# Altium PCB ATmega4809_Curiosity_Nano.PcbDoc (part 1 of 2)
Units mm, origin at the board's own origin, x right, y up, seen from the top; angles counter-clockwise.
Board outline 83.82 x 20.32 mm, 4 copper layers (Top Layer, Gnd Plane, Pwr Plane, Bottom Layer), stack 1.574 mm thick; 77 components, 102 nets, 422 pads, 194 vias.
Unrouted connection lines stored in the file: 1.
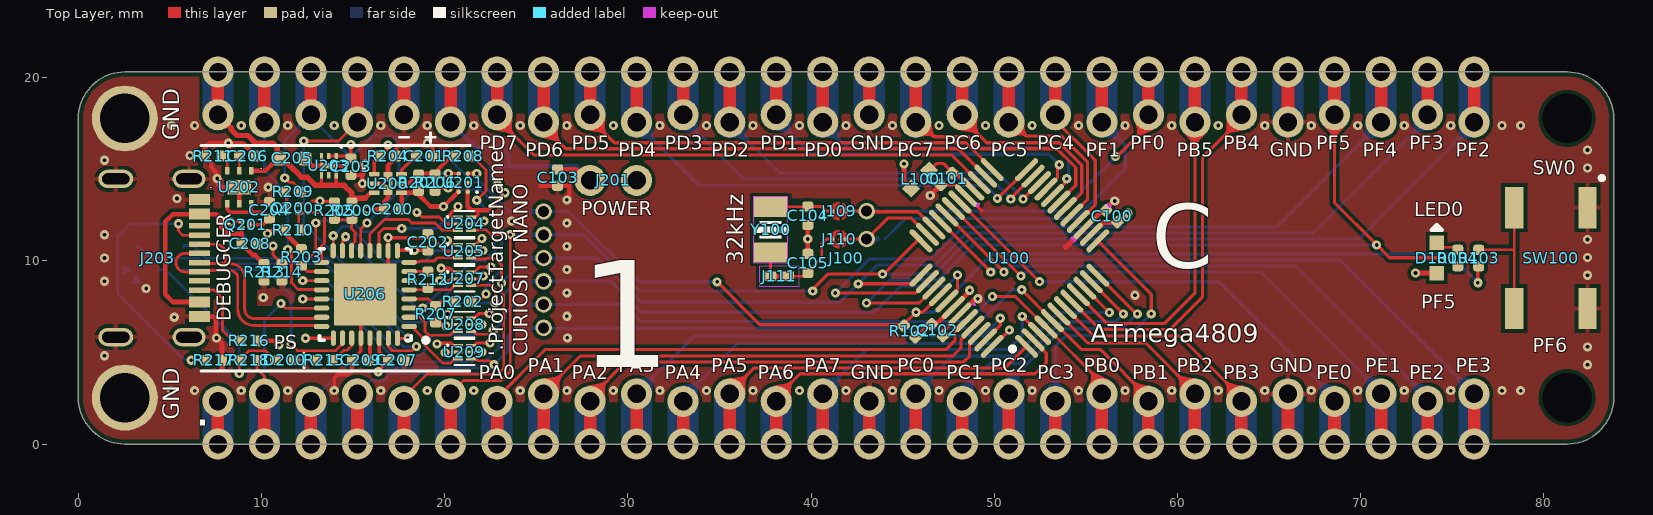
[diagram p0: Top Layer view]
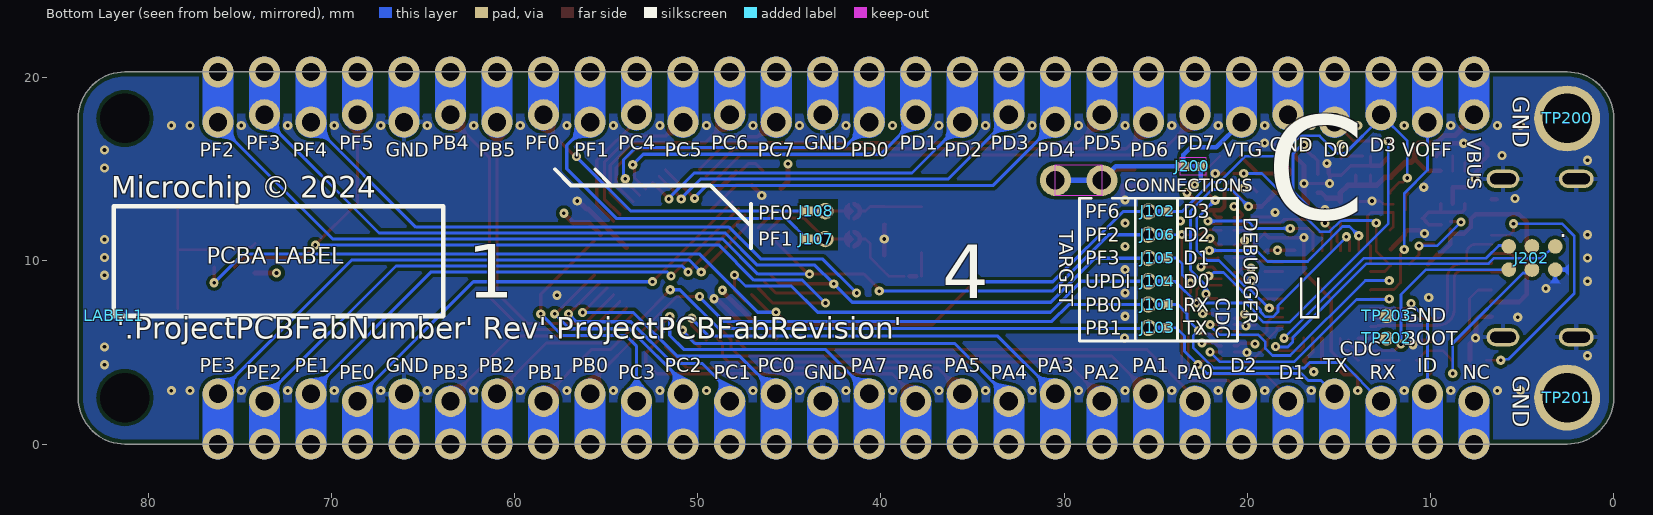
[diagram p1: Bottom Layer view, seen from below]
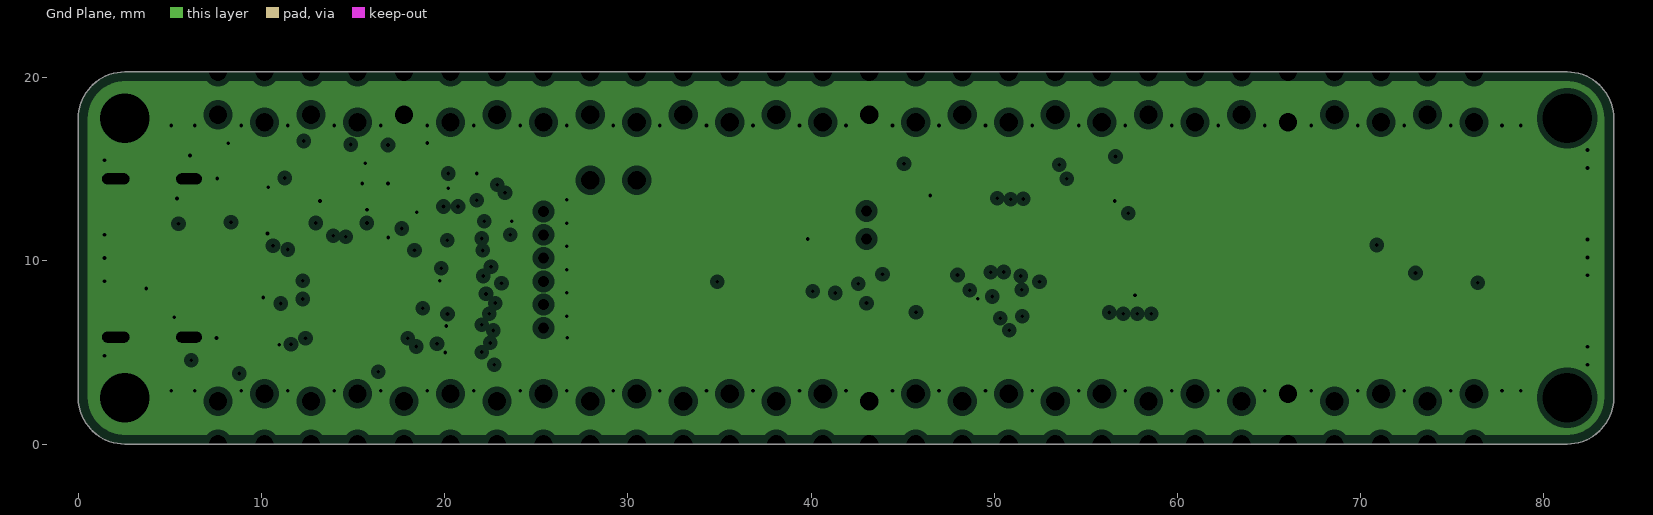
[diagram p2: Gnd Plane, clearances drawn from the general rule]
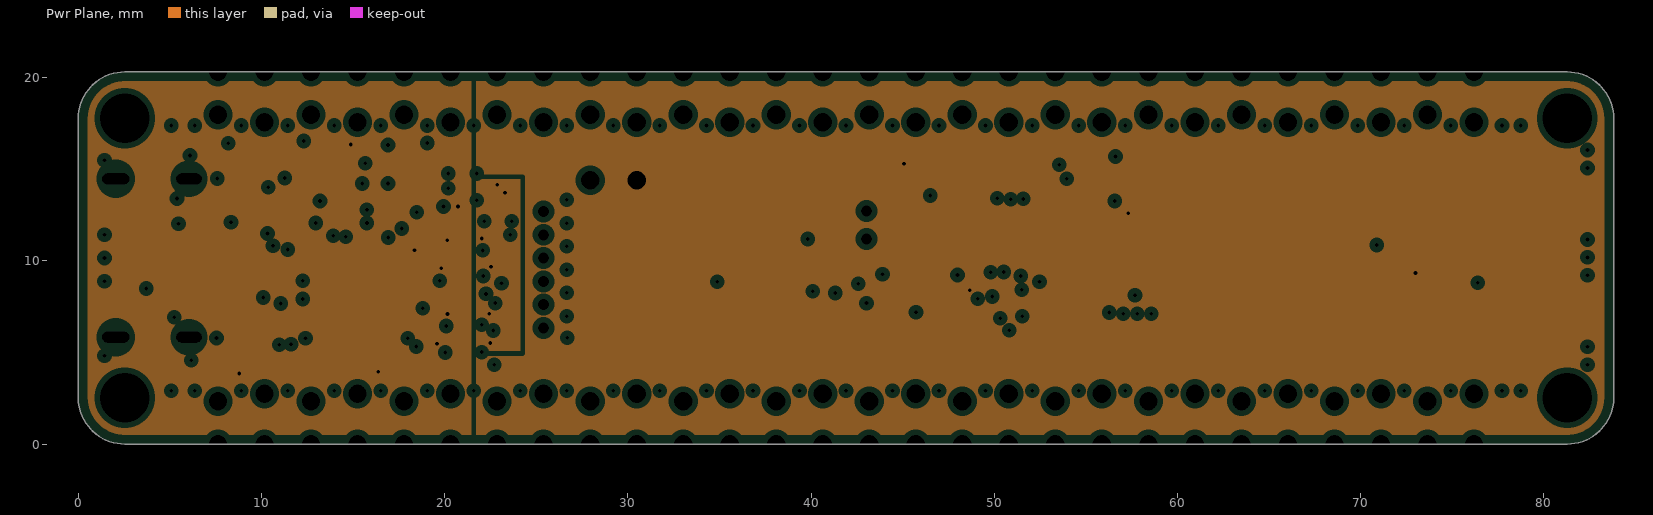
[diagram p3: Pwr Plane, clearances drawn from the general rule]
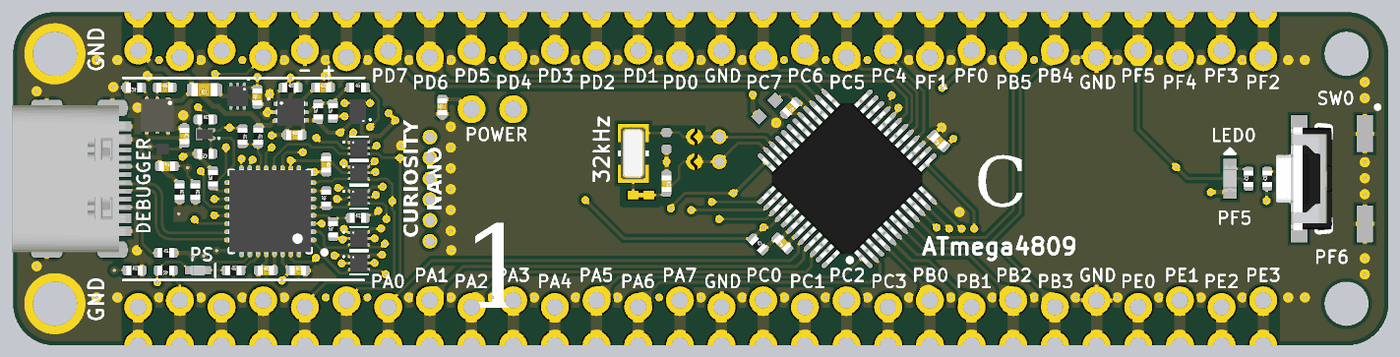
[diagram p5: 3D render of the assembled board from above, using the file's embedded part models]

## Layer stack, top to bottom
Top Solder: solder mask 0.01, Solder Resist, Dk 3.5
Top Layer: signal copper 0.035
Dielectric 1: prepreg 0.1168, PP-016, Dk 4.4
Gnd Plane: plane copper 0.035, net GND
Dielectric2: core 1.2, FR-4, Dk 4.2
Pwr Plane: plane copper 0.035, net (Multiple Nets)
Dielectric 3: prepreg 0.1168, PP-016, Dk 4.4
Bottom Layer: signal copper 0.035
Bottom Solder: solder mask 0.01, Solder Resist, Dk 3.5

## Board outline
0,2.54 0,17.78 cw(c2.54,17.78) 2.54,20.32 81.28,20.32 cw(c81.28,17.78) 83.82,17.78 83.82,2.54 cw(c81.28,2.54) 81.28,0 2.54,0 cw(c2.54,2.54)

## Design rules (kind name [scope] priority, off if disabled: settings)
AcuteAngle [All] p1: minimum=8.00000000000000E+0001 checktracksonly=FALSE
AssemblyTestPointUsage [All] p1: valid=2 allowmultiple=TRUE
AssemblyTestpoint CNANO_Testpoints [HasCompParameterValue('MCHP-ID','CON2115') Or HasCompParameterValue('MCHP-ID','CON2119') Or HasCompParameterValue('MCHP-ID','CON2120')] p1: testpointundercomponent=TRUE minsize=0.8 maxsize=2.54 preferedsize=0.8 minholesize=0 maxholesize=1.27 preferedholesize=0.25 testpointgrid=0.025 usegrid=FALSE gridtolerance=0 allowsidebottom=TRUE minspacing=1.27
AssemblyTestpoint [All] p2: testpointundercomponent=FALSE minsize=0.8 maxsize=2.54 preferedsize=0.8 minholesize=0 maxholesize=1.27 preferedholesize=0.25 testpointgrid=0.025 usegrid=FALSE gridtolerance=0 allowsidebottom=TRUE minspacing=1.27 compbodyclearance=1.27
BoardOutlineClearance BoardOutlineClearance_edge_connector [InComponent('J100')] p1: gap=0 ignorepadtopadclearanceinfootprint=FALSE
BoardOutlineClearance BoardOutlineClearance_LAYERNAME [IsText and (X1 >= 100) and (Y1 <= -60)] p2: gap=0 ignorepadtopadclearanceinfootprint=FALSE
BoardOutlineClearance [All] p3: gap=0.25 ignorepadtopadclearanceinfootprint=FALSE
Clearance Clearance_Poly_Impedance [IsRegion vs InDifferentialPairClass('All Differential Pairs')] p1: gap=0.6 ignorepadtopadclearanceinfootprint=FALSE
Clearance Clearance_Poly [InPoly] p2: gap=0.2 ignorepadtopadclearanceinfootprint=FALSE
Clearance [All] p3: gap=0.15 ignorepadtopadclearanceinfootprint=FALSE except(0.3: Arc-Hole Track-Hole SMDPad-Hole THPad-Hole Via-Hole Fill-Hole Poly-Hole Region-Hole Text-Hole)
ComponentClearance ComponentClearance_EDGE [InComponent('J100')] p1: gap=0 collisioncheckmode=3 verticalgap=0 showdistances=FALSE
ComponentClearance [All] p2: gap=0.254 collisioncheckmode=3 verticalgap=0.254 showdistances=TRUE donotcheckwithout3dbody=TRUE
DiffPairsRouting [All] p1: maxlimit=0.22 minlimit=0.22 mostfreqgap=0.22 toplayer_minwidth=0.16 toplayer_maxwidth=0.16 toplayer_prefwidth=0.16 bottomlayer_minwidth=0.16 bottomlayer_maxwidth=0.16 bottomlayer_prefwidth=0.16 maxuncoupledlength=5
FabricationTestPointUsage TestPointUsage [All] p1 off: valid=2 allowmultiple=TRUE
FabricationTestpoint Testpoint [All] p1 off: side=2 testpointundercomponent=TRUE minsize=0.8 maxsize=2.54 preferedsize=0.8 minholesize=0 maxholesize=1.27 preferedholesize=0.25 testpointgrid=0 allowsidebottom=TRUE usegrid=FALSE gridtolerance=0 minspacing=1.27
HoleSize [All] p1: absolutevalues=TRUE maxlimit=6.2 minlimit=0.2 maxpercent=80.000 minpercent=20.000
HoleToHoleClearance [All] p1: gap=0.3 allowstackedmicrovias=FALSE
MinimumAnnularRing [All] p1: minimumring=0.15
MinimumSolderMaskSliver LevelShifters [HasCompParameterValue('MCHP-ID','IC1665')] p1: minsoldermaskwidth=0.075
MinimumSolderMaskSliver [All] p2: minsoldermaskwidth=0.08
NetAntennae [Not IsTestpoint] p1: netantennaetolerance=0
PlaneClearance [All] p1: clearance=0.3
PlaneConnect PlaneConnect_MountingHoles [HasPad('TP200-1') OR HasPad('TP201-1')] p1: planeconnectstyle=Direct reliefexpansion=0.508 reliefentries=4 reliefconductorwidth=0.254 reliefairgap=0.254
PlaneConnect [All] p2: pad.planeconnectstyle=Relief pad.reliefexpansion=0.25 pad.reliefentries=4 pad.reliefconductorwidth=0.25 pad.reliefairgap=0.25 via.planeconnectstyle=Direct via.reliefexpansion=0.508 via.reliefentries=4 via.reliefconductorwidth=0.254 via.reliefairgap=0.254
PolygonConnect PolygonConnect_Special [HasPad('TP200-1') OR HasPad('TP201-1') OR HasPad('TP203-1')] p1: connectstyle=Direct reliefconductorwidth=0.254 reliefentries=4 polygonreliefangle="90 Angle" airgapwidth=0.254
PolygonConnect [All] p2: thpad.connectstyle=Relief thpad.reliefconductorwidth=0.254 thpad.reliefentries=4 thpad.polygonreliefangle="90 Angle" thpad.airgapwidth=0.2 smdpad.connectstyle=Relief smdpad.reliefconductorwidth=0.254 smdpad.reliefentries=4 smdpad.polygonreliefangle="90 Angle" smdpad.airgapwidth=0.2 via.connectstyle=Direct via.reliefconductorwidth=0.254 via.reliefentries=4 via.polygonreliefangle="90 Angle" via.airgapwidth=0.2
RoutingVias [All] p1: holewidth=0.25 width=0.55 viastyle="Through Hole" minholewidth=0.2 minwidth=0.5 maxholewidth=0.5 maxwidth=1
SMDNeckDown [All] p1: percent=98.000
SilkToSilkClearance SilkToSilkClearance_Text [IsText] p1: silktosilkclearance=0
SilkToSilkClearance [All] p2: silktosilkclearance=0.1
SilkToSolderMaskClearance SilkscreenOverComponentPads_Soldermask [All] p1: minsilkscreentomaskgap=0.12 clearancetoexposedcopper=FALSE
SilkToSolderMaskClearance SilkscreenOverComponentPads_Copper [All] p2: minsilkscreentomaskgap=0.2 clearancetoexposedcopper=TRUE
SolderMaskExpansion SolderMaskTenting [IsVia AND NOT (IsFabTestpoint OR IsAssyTestpoint)] p1: expansion=-1 istentingtop=FALSE
SolderMaskExpansion [All] p2: expansion=0.06 istentingtop=FALSE
SupplyNets "Schematic Supply Nets_9" [InNet('VCC_MCU_CORE')] p1: voltage=0.000
SupplyNets "Schematic Supply Nets_8" [InNet('VCC_REGULATOR')] p2: voltage=0.000
SupplyNets "Schematic Supply Nets_7" [InNet('VCC_TARGET')] p3: voltage=0.000
SupplyNets "Schematic Supply Nets_6" [InNet('VBUS')] p4: voltage=0.000
SupplyNets "Schematic Supply Nets_5" [InNet('VCC_VBUS')] p5: voltage=0.000
SupplyNets "Schematic Supply Nets_4" [InNet('GND')] p6: voltage=0.000
SupplyNets "Schematic Supply Nets_3" [InNet('VBUS_DELAYED')] p7: voltage=0.000
SupplyNets "Schematic Supply Nets_2" [InNet('VCC_P3V3')] p8: voltage=0.000
SupplyNets "Schematic Supply Nets_1" [InNet('VCC_EDGE')] p9: voltage=0.000
SupplyNets "Schematic Supply Nets" [InNet('VCC_LEVEL')] p10: voltage=0.000
UnRoutedNet [All] p1: checkbadconnections=TRUE
ViasUnderSMD ViasUnderSMD_Testpoint [HasPad('TP202-1') OR HasPad('U200-7')] p1: allowed=TRUE
ViasUnderSMD [All] p2: allowed=FALSE
Width [All] p1: maxlimit=10 minlimit=0.125 preferedwidth=0.15 minimp=50.000000 maximp=50.000000 favimp=50.000000
15 further rules are at their usual default settings.

## Classes and differential pairs
component class ATmega4809_Curiosity_Nano_TopLevel: LABEL1 Test1 Test2
component class S2: C100 C101 C102 C103 C104 C105 D100 J100 J101 J102 J103 J104 J105 J106 J107 J108 J109 J110 J111 L100 R102 R103 R104 SW100 U100 Y100
component class S1: C200 C201 C202 C203 C204 C205 C206 C207 C208 C209 D200 J200 J201 J202 J203 Q200 Q201 R200 R201 R202 R203 R204 R205 R206 R207 R208 R209 R210 R211 R212 R213 R214 R215 R216 R217 R218 TP200 TP201 TP202 TP203 U200 U201 U202 U203 U204 U205 U206 U207 U208 U209
net class Power: GND VCC_EDGE VCC_LEVEL VCC_P3V3 VCC_REGULATOR VCC_VBUS
differential pair USBD: +USBD_P -USBD_N

## Components (designator, comment, footprint, x,y, rotation, side; value= is the part's Value field where it differs from the comment)
C100 "" AP1-00148 56.418,12.446 r135 top locked value=100n
C101 "" AP1-00148 47.401,14.478 r225 top locked value=100n
C102 "" AP1-00148 46.893,6.223 r135 top locked value=100n
C103 "" AP1-00148 26.162,14.554 r90 top locked value=2.2uF
C104 "RFA-C" AP1-00141 39.825,11.968 r90 top value=8.2pF
C105 "" AP1-00038 39.825,9.87 r90 top value=10pF
C200 "" AP1-00148 17.145,12.827 r0 top locked value=2.2uF
C201 "" AP1-00148 18.88,15.725 r0 top locked value=100n
C202 "" AP1-00148 19.08,11.025 r270 top locked value=100n
C203 "" AP1-00148 14.879,15.15 r90 top locked value=2.2uF
C204 "" AP1-00148 10.434,12.777 r270 top locked value=2.2uF
C205 "" AP1-00039 11.658,15.597 r180 top locked value=4.7uF
C206 "" AP1-00148 9.235,15.725 r0 top locked value=2.2nF
C207 "" AP1-00148 17.355,4.575 r0 top locked value=100n
C208 "" AP1-00148 9.368,10.931 r0 top locked value=100n
C209 "" AP1-00148 15.405,4.575 r0 top locked value=1u
D100 "" AP4-00169 74.168,10.16 r270 top locked value="YELLOW LED"
D200 "" AP4-00160 11.265,4.575 r180 top locked value="GREEN LED"
J100 "" AP8-01100 7.62,10.16 r0 top locked value="CNANO56-pin edge connector"
J101 "" AP8-01166 24.875,7.62 r0 bottom locked net-tie value="Closed Link"
J102 "" AP8-01166 24.875,12.7 r0 bottom locked net-tie value="Closed Link"
J103 "" AP8-01166 24.875,6.35 r0 bottom locked net-tie value="Closed Link"
J104 "" AP8-01166 24.875,8.89 r0 bottom locked net-tie value="Closed Link"
J105 "" AP8-01166 24.875,10.16 r0 bottom locked net-tie value="Closed Link"
J106 "" AP8-01166 24.875,11.43 r0 bottom locked net-tie value="Closed Link"
J107 "" AP8-01166 43.565,11.197 r180 bottom locked net-tie value="Closed Link"
J108 "" AP8-01166 43.565,12.722 r180 bottom locked net-tie value="Closed Link"
J109 "" AP9-00172 41.528,12.722 r180 top locked value=SOLDER-STRAP_OPEN
J110 "" AP9-00172 41.528,11.197 r180 top locked value=SOLDER-STRAP_OPEN
J111 "" AP8-00595 38.268,9.166 r180 top locked net-tie value="Closed Link"
J200 "" AP8-00595 23.015,15.162 r0 bottom locked net-tie value="Closed Link"
J201 "" AP8-01183 29.21,14.402 r0 top locked net-tie value="Closed Link 1x2 100mil header"
J202 "" AP8-01249 4.46,10.16 r0 bottom locked value="Testpoint Array 2x3 JTAG"
J203 "" AP8-01248 3.4,10.16 r270 top locked value=L-KLS1-5409-R
L100 "part number either has \"D\" (tape and reel) or \"B\" (Bulk) at the end." AP3-00005 45.957,14.45 r45 top locked value=BLM18PG471SN1D
LABEL1 "" AP8-00317 81.891,6.996 r180 bottom locked value="Label PCBA"
Q200 "" AP5-00056 11.69,12.875 r180 top locked value=DMN65D8LFB
Q201 "" AP5-00062 9.102,11.975 r0 top locked value=CSD25501F3
R102 "" AP2-00108 45.39,6.15 r315 top locked value=47k
R103 "" AP2-00108 76.454,10.16 r90 top locked value=1k
R104 "" AP2-00108 75.311,10.16 r90 top locked value=1k
R200 "" AP2-00108 14.929,12.75 r270 top locked value=47k
R201 "" AP2-00108 18.58,14.275 r90 top locked value=47k
R202 "" AP2-00108 21,7.775 r0 top locked value=47k
R203 "" AP2-00108 12.175,10.194 r90 top locked value=47k
R204 "" AP2-00108 16.905,15.725 r0 top locked value=47k
R205 "" AP2-00108 13.979,12.75 r270 top locked value=47k
R206 "" AP2-00108 19.48,14.275 r90 top locked value=27k
R207 "" AP2-00108 19.505,7.079 r90 top locked value=47k
R208 "" AP2-00108 20.992,15.725 r0 top locked value=33k
R209 "" AP2-00108 11.715,13.775 r0 top locked value=1k
R210 "" AP2-00108 11.715,11.684 r180 top locked value=47k
R211 "" AP2-00108 7.363,15.725 r180 top locked value=470R
R212 "" AP2-00108 19.08,8.974 r90 top locked value=1k
R213 "" AP2-00108 10.144,9.375 r270 top locked value=47k
R214 "" AP2-00108 11.11,9.375 r270 top locked value=47k
R215 "" AP2-00108 13.43,4.575 r0 top locked value=1k
R216 "" AP2-00108 9.302,5.633 r0 top locked value=5.1K
R217 "" AP2-00108 7.394,4.575 r0 top locked value=5.1K
R218 "" AP2-00108 9.298,4.575 r180 top locked value=1k
SW100 "Rating: DC 12V 50mA / Max 0.1 ohm contact resistance" AP8-00137 80.391,10.16 r270 top locked value=TS604VM1-035CR
TP200 "PCB implemented component." AP8-01250 2.54,17.78 r90 bottom locked value="TH Test point - D3.6H2.7"
TP201 "PCB implemented component." AP8-01250 2.54,2.54 r90 bottom locked value="TH Test point - D3.6H2.7"
TP202 "PCB implemented component." AP8-00870 12.4,5.777 r180 bottom locked value="SMD Test point - 0.8mm"
TP203 "PCB implemented component." AP8-00870 12.4,7 r180 bottom locked value="SMD Test point - 0.8mm"
U100 "" AP6-00357 50.83,10.16 r135 top locked value=ATmega4809-AFR
U200 "Marking code: AAR" AP6-00504 16.905,14.225 r0 top locked value=MIC5353
U201 "" AP6-00513 21.013,14.267 r180 top locked value=MIC94163
U202 "" AP6-00576 8.785,14.028 r270 top locked value=MIC2008YML
U203 "" AP6-00481 13.679,15.2 r270 top locked value=MIC5528-3.3YMT
U204 "" AP6-00575 21.079,12.025 r0 top locked value=74LVC1T45FW4-7
U205 "" AP6-00575 21.079,10.525 r0 top locked value=74LVC1T45FW4-7
U206 "QFN32" AP6-00418 15.67,8.17 r90 top locked value=SAMD21E18A-MUT
U207 "" AP6-00575 21.079,9.025 r0 top locked value=74LVC1T45FW4-7
U208 "" AP6-00575 21.079,6.525 r0 top locked value=74LVC1T45FW4-7
U209 "" AP6-00575 21.079,5.025 r0 top locked value=74LVC1T45FW4-7
Y100 "" AP7-00069 37.793,11.706 r270 top locked value=32.768kHz

## Footprints (in the part's own frame and the unit in brackets; to place one, negate y for a bottom-side part, rotate by r counter-clockwise, add the part's x,y. Pads: shape width x height; smd on the part's side, far side on the other; paste and mask are expansions set on the pad)
AP1-00038 [mm] "Generic pad 0402, spacing 0.45mm"
  rrect50% 0.55x0.6 smd: 1(-0.525,0) 2(0.525,0)
  body extent -0.5,-0.3 0.5,0.3, height 0.2
AP1-00039 [mil] "Capacitor 0603 Hight 0.8mm"
  rrect50% 30x30 smd: 1(-27.5,0) 2(27.5,0)
  body extent -31,-16 32,16, height 12
AP1-00141 [mm] "SMD 0402(EIA) C, 1.0mm x 0.5mm"
  rrect50% 0.55x0.6 smd: 1(-0.008,0) 2(1.008,0)
  body extent -0.01,-0.25 1.01,0.25, height 0.4
AP1-00148 [mm] "Chip Capacitor, 2-Leads, Body 1.0x0.5mm, IPC High Density"
  rrect50% 0.55x0.6 smd: 1(-0.45,0) 2(0.45,0)
  body extent -0.5,-0.3 0.5,0.3, height 0.2
AP2-00108 [mm] "Chip Resistor, 2-Leads, Body 1.0x0.5mm, IPC Medium Density"
  rrect50% 0.55x0.6 smd: 1(-0.45,0) 2(0.45,0)
  body extent -0.5,-0.3 0.5,0.3, height 0.2
AP3-00005 [mm]
  rect 0.7x0.7 smd: 1(-0.7,0) 2(0.7,0)
  body extent -0.83,-0.41 0.82,0.41, height 0.8
AP4-00160 [mm] "ROHM SML-P11 0402 LED"
  rect 0.6x0.5 smd: 1(-0.5,0) 2(0.5,0)
  silkscreen extent -1.06,-0.4 -1.06,0.4, body extent -0.5,-0.3 0.5,0.3, height 0.19
AP4-00169 [mm] "ROHM SML-D1x 0603 LED"
  rect 0.8x0.8 smd: 1(-0.825,0) 2(0.825,0)
  silkscreen extent -1.83,-0.3 -1.53,0.3, body extent -0.8,-0.4 0.8,0.4, height 0.54
AP5-00056 [mm] "DFN1006-3/SOT883, 3-Leads, Body 1,050x0,65mm, Pitch 0,35mm"
  oval 0.508x0.229 on Top Paste: 0(-0.4,0.25) 0(-0.4,-0.25)
  rect 0.4x0.25 smd paste-1: 1(-0.35,0.225) 2(-0.35,-0.225)
  rect 0.4x0.7 smd: 3(0.35,0)
  silkscreen extent -0.9,0.2 -0.8,0.3, body extent -0.5,-0.3 0.5,0.3, height 0.49
AP5-00062 [mm]
  rrect50% 0.25x0.2 on Top Paste: 0(-0.175,-0.2) 0(-0.175,0.2)
  rrect80% 0.35x0.25 smd paste-2539.97 mask-0.05: 1(-0.175,0.175) 2(-0.175,-0.175)
  rrect80% 0.25x0.6 smd paste-0.05 mask-0.05: 3(0.225,0)
  body extent -0.37,-0.32 0.37,0.32, height 0.22
AP6-00357 [mm]
  oval 1.65x0.3 smd: 1(-4.075,2.75) 2(-4.075,2.25) 3(-4.075,1.75) 4(-4.075,1.25) 5(-4.075,0.75) 6(-4.075,0.25) 7(-4.075,-0.25) 8(-4.075,-0.75) 9(-4.075,-1.25) 10(-4.075,-1.75) 11(-4.075,-2.25) 12(-4.075,-2.75) 25(4.075,-2.75) 26(4.075,-2.25) 27(4.075,-1.75) 28(4.075,-1.25) 29(4.075,-0.75) 30(4.075,-0.25) 31(4.075,0.25) 32(4.075,0.75) 33(4.075,1.25) 34(4.075,1.75) 35(4.075,2.25) 36(4.075,2.75)
  oval 0.3x1.65 smd: 13(-2.75,-4.075) 14(-2.25,-4.075) 15(-1.75,-4.075) 16(-1.25,-4.075) 17(-0.75,-4.075) 18(-0.25,-4.075) 19(0.25,-4.075) 20(0.75,-4.075) 21(1.25,-4.075) 22(1.75,-4.075) 23(2.25,-4.075) 24(2.75,-4.075) 37(2.75,4.075) 38(2.25,4.075) 39(1.75,4.075) 40(1.25,4.075) 41(0.75,4.075) 42(0.25,4.075) 43(-0.25,4.075) 44(-0.75,4.075) 45(-1.25,4.075) 46(-1.75,4.075) 47(-2.25,4.075) 48(-2.75,4.075)
  silkscreen extent -3.75,3.26 -3.5,3.51, body extent -4.5,-4.5 4.5,4.5, height 1.45
AP6-00418 [mm] "MLF-32 solder foot print"
  oval 0.28x0.85 smd paste-0.03 mask+0: 1(-1.746,-2.39) 2(-1.246,-2.39) 3(-0.746,-2.39) 4(-0.246,-2.39) 5(0.254,-2.39) 6(0.754,-2.39) 7(1.254,-2.39) 8(1.754,-2.39) 17(1.754,2.39) 18(1.254,2.39) 19(0.754,2.39) 20(0.254,2.39) 21(-0.246,2.39) 22(-0.746,2.39) 23(-1.246,2.39) 24(-1.746,2.39)
  oval 0.85x0.28 smd paste-0.03 mask+0: 9(2.386,-1.746) 10(2.386,-1.246) 11(2.386,-0.746) 12(2.386,-0.246) 13(2.386,0.254) 14(2.386,0.754) 15(2.386,1.254) 16(2.386,1.754) 25(-2.383,1.746) 26(-2.383,1.246) 27(-2.383,0.746) 28(-2.383,0.246) 29(-2.383,-0.254) 30(-2.383,-0.754) 31(-2.383,-1.254) 32(-2.386,-1.75)
  rect 3.4x3.4 smd paste-1.7 mask+0: 33(0.004,0)
  silkscreen extent -2.62,-3.43 2.5,2.5, body extent -2.55,-2.55 2.55,2.55, height 1
AP6-00481 [mm] "6 Pin 1.2mm X 1.2mm Thin DFN"
  rect 0.35x0.18 smd: 1(-0.531,0.4) 2(-0.531,0) 3(-0.531,-0.4) 4(0.531,-0.4) 5(0.531,0) 6(0.531,0.4)
  rect 0.28x0.94 smd: 7(0,0)
  silkscreen extent -1.08,0.62 -0.98,0.72, body extent -0.63,-0.62 0.63,0.63, height 0.6
AP6-00504 [mm] "MLF, 6-Leads, Body 1,60x1,60mm, Pitch 0,50mm, Thermal Pad 1,26x0,33mm, IPC High Density"
  rect 0.6x0.25 smd mask+0.05: 1(-0.75,0.5) 2(-0.75,0) 3(-0.75,-0.5) 4(0.75,-0.5) 5(0.75,0) 6(0.75,0.5)
  rect 0.5x1.26 smd paste-0.1 mask+0.05: 7(0,0)
  silkscreen extent -1.38,0.75 -1.28,0.85, body extent -0.87,-0.82 0.87,0.82, height 0.55
AP6-00513 [mm] "BGA, 6-Leads, Body 1,00x1,50mmx0,80mm, Pitch 0,50mm"
  round 0.25 smd mask+0.05: A1(-0.25,0.5) A2(0.25,0.5) B1(-0.25,0) B2(0.25,0) C1(-0.25,-0.5) C2(0.25,-0.5)
  silkscreen extent -0.8,0.46 -0.7,0.56, body extent -0.5,-0.75 0.5,0.75, height 0.8
AP6-00575 [mm] "X2-DFN1010, 6-Leads, Body 1,05x1,05mm, Pitch 0,35mm, IPC High Density"
  rect 0.535x0.185 smd mask+0.05: 1(-0.357,0.357) 3(-0.357,-0.357) 4(0.357,-0.357) 6(0.357,0.357)
  rect 0.535x0.17 smd mask+0.05: 2(-0.357,0) 5(0.357,0)
  silkscreen extent -0.97,-0.7 0.55,0.7, body extent -0.53,-0.53 0.53,0.53, height 0.4
AP6-00576 [mm] "MLF 6-pad, 2mm x 2mm, 0.9mm hight"
  rect 0.36x0.26 on Top Paste: 0(-0.88,0.65) 0(-0.88,0) 0(-0.88,-0.65) 0(0.88,0.65) 0(0.88,0) 0(0.88,-0.65)
  rect 0.6x0.4 on Top Paste: 0(0,0.3) 0(0,-0.3)
  rect 0.4x0.26 smd paste-1: 1(-0.9,0.65) 2(-0.9,0) 3(-0.9,-0.65) 4(0.9,-0.65) 5(0.9,0) 6(0.9,0.65)
  rect 0.8x1.3 smd paste-1: 7(0,0)
  body extent -1,-1 1,1, height 0.9
AP7-00069 [mm]
  rect 1.1x1.9 smd paste-2539.97: 1(-1.25,0) 2(1.25,0)
  Top Layer pour cut-out: -0.6,0.95 -0.6,-0.95 0.6,-0.95 0.6,0.95
  silkscreen extent -0.48,-0.95 0.47,0.95, body extent -1.6,-0.75 1.6,0.75, height 0.8
AP8-00137 [mm]
  rect 2.25x1 smd: 1(-2.75,2) 2(2.75,2) 3(-2.75,-2) 4(2.75,-2)
  silkscreen extent -4.46,2.68 -4.27,2.88, body extent -3.4,-3.21 3.4,3.22, height 3.47
AP8-00317 [mm] "Placement area for 18x6mm sticker"
  silkscreen extent 0,0 18,6
AP8-00595 [mm]
  rect 0.65x0.5 smd paste-1: 1(-0.475,0) 2(0.475,0)
  Top Layer lines w0.254: 0.2,0 -0.175,0
AP8-00870 [mil] "TP_SMT_.8mm"
  round 31.5 smd paste-99999: 1(0,0)
AP8-01100 [mil] "56-pin Header staggered with castellations (for CNANO)"
  round 67 hole 39.37 mask+3.94: 1(0,-400) 1(0,-308) 2(100,-400) 2(100,-292) 3(200,-400) 3(200,-308) 4(300,-400) 4(300,-292) 5(400,-400) 5(400,-308) 6(500,-400) 6(500,-292) 7(600,-400) 7(600,-308) 8(700,-400) 8(700,-292) 9(800,-400) 9(800,-308) 10(900,-400) 10(900,-292) 11(1000,-400) 11(1000,-308) 12(1100,-400) 12(1100,-292) 13(1200,-400) 13(1200,-308) 14(1300,-400) 14(1300,-292) 15(1400,-400) 15(1400,-308) 16(1500,-400) 16(1500,-292) 17(1600,-400) 17(1600,-308) 18(1700,-400) 18(1700,-292) 19(1800,-400) 19(1800,-308) 20(1900,-400) 20(1900,-292) 21(2000,-400) 21(2000,-308) 22(2100,-400) 22(2100,-292) 23(2200,-400) 23(2200,-308) 24(2300,-400) 24(2300,-292) 25(2400,-400) 25(2400,-308) 26(2500,-400) 26(2500,-292) 27(2600,-400) 27(2600,-308) 28(2700,-400) 28(2700,-292) 29(2700,292) 29(2700,400) 30(2600,308) 30(2600,400) 31(2500,292) 31(2500,400) 32(2400,308) 32(2400,400) 33(2300,292) 33(2300,400) 34(2200,308) 34(2200,400) 35(2100,292) 35(2100,400) 36(2000,308) 36(2000,400) 37(1900,292) 37(1900,400) 38(1800,308) 38(1800,400) 39(1700,292) 39(1700,400) 40(1600,308) 40(1600,400) 41(1500,292) 41(1500,400) 42(1400,308) 42(1400,400) 43(1300,292) 43(1300,400) 44(1200,308) 44(1200,400) 45(1100,292) 45(1100,400) 46(1000,308) 46(1000,400) 47(900,292) 47(900,400) 48(800,308) 48(800,400) 49(700,292) 49(700,400) 50(600,308) 50(600,400) 51(500,292) 51(500,400) 52(400,308) 52(400,400) 53(300,292) 53(300,400) 54(200,308) 54(200,400) 55(100,292) 55(100,400) 56(0,308) 56(0,400)
  Top Layer lines w27: 0,-400 0,-308 ; 0,308 0,400 ; 100,-400 100,-292 ; 100,292 100,400 ; 200,-400 200,-308 ; 200,308 200,400 ; 300,-400 300,-292 ; 300,292 300,400 ; 400,-400 400,-308 ; 400,308 400,400 ; 500,-400 500,-292 ; 500,292 500,400 ; 600,-400 600,-308 ; 600,308 600,400 ; 700,-400 700,-292 ; 700,292 700,400 ; 800,-400 800,-308 ; 800,308 800,400 ; 900,-400 900,-292 ; 900,292 900,400 ; 1000,-400 1000,-308 ; 1000,308 1000,400 ; 1100,-400 1100,-292 ; 1100,292 1100,400 ; 1200,-400 1200,-308 ; 1200,308 1200,400 ; 1300,-400 1300,-292 ; 1300,292 1300,400 ; 1400,-400 1400,-308 ; 1400,308 1400,400 ; 1500,-400 1500,-292 ; 1500,292 1500,400 ; 1600,-400 1600,-308 ; 1600,308 1600,400 ; 1700,-400 1700,-292 ; 1700,292 1700,400 ; 1800,-400 1800,-308 ; 1800,308 1800,400 ; 1900,-400 1900,-300 1900,-292 ; 1900,292 1900,400 ; 2000,-400 2000,-308 ; 2000,308 2000,400 ; 2100,-400 2100,-292 ; 2100,292 2100,400 ; 2200,-400 2200,-308 ; 2200,308 2200,400 ; 2300,-400 2300,-292 ; 2300,292 2300,400 ; 2400,-400 2400,-308 ; 2400,308 2400,400 ; 2500,-400 2500,-292 ; 2500,292 2500,400 ; 2600,-400 2600,-308 ; 2600,308 2600,400 ; 2700,-400 2700,-292 ; 2700,292 2700,400
  Bottom Layer lines w67: 0,-400 0,-308 ; 0,308 0,400 ; 100,-400 100,-292 ; 100,292 100,400 ; 200,-400 200,-308 ; 200,308 200,400 ; 300,-400 300,-292 ; 300,292 300,400 ; 400,-400 400,-308 ; 400,308 400,400 ; 500,-400 500,-292 ; 500,292 500,400 ; 600,-400 600,-308 ; 600,308 600,400 ; 700,-400 700,-292 ; 700,292 700,400 ; 800,-400 800,-308 ; 800,308 800,400 ; 900,-400 900,-292 ; 900,292 900,300 900,400 ; 1000,-400 1000,-308 ; 1000,308 1000,400 ; 1100,-400 1100,-292 ; 1100,292 1100,400 ; 1200,-400 1200,-308 ; 1200,308 1200,400 ; 1300,-400 1300,-292 ; 1300,292 1300,400 ; 1400,-400 1400,-308 ; 1400,308 1400,400 ; 1500,-400 1500,-300 1500,-292 ; 1500,292 1500,400 ; 1600,-400 1600,-308 ; 1600,308 1600,400 ; 1700,-400 1700,-292 ; 1700,292 1700,400 ; 1800,-400 1800,-308 ; 1800,308 1800,400 ; 1900,-400 1900,-292 ; 1900,292 1900,400 ; 2000,-400 2000,-308 ; 2000,308 2000,400 ; 2100,-400 2100,-292 ; 2100,292 2100,400 ; 2200,-400 2200,-308 ; 2200,308 2200,400 ; 2300,-400 2300,-292 ; 2300,292 2300,400 ; 2400,-400 2400,-308 ; 2400,308 2400,400 ; 2500,-400 2500,-292 ; 2500,292 2500,400 ; 2600,-400 2600,-308 ; 2600,308 2600,400 ; 2700,-400 2700,-292 ; 2700,292 2700,300 2700,400
  Multi-Layer pour cut-out: 2740,310 2740,450 -40,450 -40,310
  Multi-Layer pour cut-out: -40,-310 -40,-450 2740,-450 2740,-310
AP8-01166 [mm] "Cut-Strap 0402 with hole"
  rect 0.65x0.5 smd paste-1: 1(-0.475,0)
  round 0.9 hole 0.6 paste-2539.97: 2(0.525,0)
  Top Layer region: -0.175,0.125 0.175,0.125 0.175,-0.125 -0.175,-0.125
AP8-01183 [mm] "closed link, 100-mil 1 x 2 pin header footprint"
  round 1.7 hole 1.02: 1(-1.27,0) 2(1.27,0)
  Bottom Layer lines w0.3: -1.27,0 1.27,0
AP8-01248 [mm]
  rrect50% 1x1.8 on Top Paste: 0(-4.32,2.645) 0(4.32,2.645)
  rrect50% 1x1.9 on Top Paste: 0(-4.32,-1.355) 0(4.32,-1.355)
  oval 1x1.8 hole 0.6 slot 1.4 at 90 deg: 1(-4.32,2.645) 2(4.32,2.645)
  oval 1x1.9 hole 0.6 slot 1.5 at 90 deg: 3(-4.32,-1.355) 4(4.32,-1.355)
  rect 0.6x1.15 smd: A1/B12(-3.2,3.21) A4/B9(-2.4,3.21) B1/A12(3.2,3.21) B4/A9(2.4,3.21)
  rect 0.3x1.15 smd: A5(-1.25,3.21) A6(-0.25,3.21) A7(0.25,3.21) A8(1.25,3.21) B5(1.75,3.21) B6(0.75,3.21) B7(-0.75,3.21) B8(-1.75,3.21)
  body extent -4.47,-3.46 4.47,3.45, height 3.26
AP8-01249 [mm] "SMT test point array 2x3 0.8mm, Pitch 1.27 mm"
  round 0.8 smd paste-1: 1(-1.27,-0.635) 2(-1.27,0.635) 3(0,-0.635) 4(0,0.635) 5(1.27,-0.635) 6(1.27,0.635)
AP8-01250 [mm] "Test Point round, diam=3.6mm, drill=2.7mm"
  round 3.6 hole 2.7: 1(0,0)
AP9-00172 [mm]
  round 0.25 smd paste-4 mask-2: 1(-0.375,0) 2(0.375,0)
  round 1.05 on Top Solder: 5(0,0)
  Top Layer region: 0,-0.5 0.217,-0.45 0.391,-0.312 0.487,-0.111 0.487,0.111 0.391,0.312 0.217,0.45 0,0.5 0,0.5 0,0.325 0.25,0.075 0.25,-0.075 0,-0.325
  Top Layer region: -0.175,-0.468 -0.373,-0.333 -0.485,-0.12 -0.486,0.12 -0.373,0.333 -0.175,0.468 -0.175,0.468 -0.175,0.25 0.075,0 -0.175,-0.25

## Part data
C100 C101 C102 C201 C202 C207 C208: library part A01-0246, "Ceramic capacitor, SMD 0402, X7R, 16V, +/-10%", Manufacturer=Yageo, MPN=CC0402KRX7R7BB104, TemperatureRange="-55 - +125 deg C", Tolerance="16V, +/-10%", AN=A01-0246, Height=0.5, PartGroup="Capacitors,Ceramic,SMD 0402"
C103 C200 C203 C204: library part A01-0493, "CAP CER 2.2UF 10V 10% X5R 0402", Manufacturer=TDK, MPN=C1005X5R1A225K050BC, TemperatureRange="-55 to 85C", Tolerance=+/-10%, AN=A01-0493, Height=0.5, PartGroup="Capacitors,Ceramic,SMD 0402"
C104: library part A01-0803, "8.2pF GCQ15 Series HiQ Automotive 0402(EIA)", Manufacturer=Murata, MPN=GCQ1555C1H8R2D, Tolerance=+/-0.5, AN=A01-0803, Height=0.5, PartGroup="Capacitors,Ceramic,SMD 0402"
C105: library part A01-0356, "Ceramic capacitor, SMD 0402, NP0, 50V, +/-5% (de16674)", Manufacturer=Yageo, MPN=CC0402JRNPO9BN100, TemperatureRange="-55 - +125 deg C", Tolerance=5%, AN=A01-0356, PartGroup="Capacitors,Ceramic,SMD 0402"
C205: library part A01-0377, "Ceramic capacitor, SMD 0603, X5R, 10V, 10% (de31036)", Manufacturer=Yageo, MPN=CC0603KRX5R6BB475, TemperatureRange="-55 - +85 deg C", Tolerance=10%, AN=A01-0377, Height=0.800000011920929, PartGroup="Capacitors,Ceramic,SMD 0603"
C206: library part A01-0918, "Ceramic capacitor, SMD 0402, C0G, 25V, +/-5%", Manufacturer=Kemet, MPN=C0402C222J3GACTU, TemperatureRange="-55C to +125C", Tolerance="25V, +/-5%", AN=A01-0918, Height=0.5, PartGroup="Capacitors,Ceramic,SMD 0402"
C209: library part A01-0286, "Ceramic capacitor, SMD 0402, X5R, 6.3V, +/-10% (de26942)", Manufacturer=Kemet, MPN=C0402C105K9PAC, TemperatureRange="-55 to 85 deg C", Tolerance=+/-10%, AN=A01-0286, Height=0.5, PartGroup="Capacitors,Ceramic,SMD 0402"
D100: library part A10-0218, "LED, SMD 0603, Yellow, Wave length=590nm, 100mcd @ (20mA, 2.2Vf) rohm", Manufacturer=ROHM, MPN=SML-D12Y1WT86, TemperatureRange="-40 to +85", AN=A10-0218, Height=0.550000011920929, PartGroup=Opto,LEDs,SMD
D200: library part A10-0213, "LED, SMD 0402, Green, Wave length=569nm, 2.1mcd @ (1mA, 1.9Vf)rohm", Manufacturer=ROHM, MPN=SML-P12MTT86R, TemperatureRange="-40 to +85", AN=A10-0213, Height=0.200000002980232, PartGroup=Opto,LEDs,SMD
J100: library part A08-2840, "Curiosity Nano 56-pin edge connector with castellations, 100-mil pitch.", AN=A08-2840, PartGroup="Mechanical devices,Connectors,Pin headers"
J101 J102 J103 J104 J105 J106 J107 J108: library part A08-2981, "Closed Link 0402 w/50mil hole", AN=A08-2981, PartGroup="Mechanical devices,PCB implemented components"
J109 J110: library part A08-2866, "1x1mm, Round Strap, Open, no frame", AN=A08-2866, Height=0, PartGroup="Mechanical devices,PCB implemented components"
J111 J200: library part A08-1454, "Closed Link 0402", AN=A08-1454, PartGroup="Mechanical devices,PCB implemented components"
J201: library part A08-3029, "Closed Link with w/hole for 1x2 100mil header", AN=A08-3029, PartGroup="Mechanical devices,PCB implemented components"
J202: library part A08-3186, "6-pin Testpoint Array, 0.8mm Pad, 1.27mm Pitch", AN=A08-3186, Height=0, PartGroup="Mechanical devices,PCB implemented components,PCB plane connectors"
J203: library part A08-3185, "USB2.0 Type-C, Surface mount signals and DIP shield", Manufacturer="Cabcon A/S", MPN=L-KLS1-5409-R, TemperatureRange="-30 to 85C", AN=A08-3185, Height=3.16000008583069, PartGroup="Mechanical devices,Connectors,USB"
L100: library part A03-0035, "SMD RF inductor 0603. Z=470Ohm (@100MHz), Max R(dc)=0.20Ohm, Max current=1A", Manufacturer=Murata, MPN=BLM18PG471SN1D, TemperatureRange=-55, AN=A03-0035, Height=0.800000011920929, PartGroup=Inductors,EMI
LABEL1: library part A09-0611, "PCBA identification label PP Top White Gloss", Manufacturer="ACT Logimark AS", MPN=505462, AN=A09-0611, PartGroup="Mechanical devices,Packaging materials,Printed Labels,PCBA"
Q200: library part A05-0180, "N-channel MOSFET, DFN1006-3 (SOT883), 60V, 330mA, 4Ohm", Manufacturer="Diodes Incorporated", MPN=DMN65D8LFB-7, TemperatureRange="-55Â°C to +150Â°C", AN=A05-0180, PartGroup="Transistors,Small signal FET,SMD"
Q201: library part A05-0209, "P-Channel MOSFET, LGA, 20V, 3.6A, 76mOhm", Manufacturer="Texas Instruments", MPN=CSD25501F3, TemperatureRange="-55 to 150C", AN=A05-0209, Height=0.200000002980232, PartGroup="Transistors,Small signal FET,SMD"
R102 R200 R201 R202 R203 R204 R205 R207 R210 R213 R214: library part A02-0252, "Thick film resistor, SMD 0402, 1/16W, 1%", Manufacturer=KOA, MPN=RK73H1ETTP4702F, TemperatureRange="-55 - +125 deg C", Tolerance="1 %", AN=A02-0252, Height=0.349999994039536, PartGroup="Resistors,SMD,0402 1%"
R103 R104 R209 R212 R215 R218: library part A02-0212, "Thick film resistor, SMD 0402, 1/16W, 1%", Manufacturer=Yageo, MPN=RC0402FR071KL, TemperatureRange="-55 - +125 deg C", Tolerance="1 %", AN=A02-0212, Height=0.349999994039536, PartGroup="Resistors,SMD,0402 1%"
R206: library part A02-0246, "Thick film resistor, SMD 0402, 1/16W, 1%", Manufacturer=Yageo, MPN=RC0402FR-0727KL, TemperatureRange="-55 - +125 deg C", Tolerance="1 %", AN=A02-0246, Height=0.349999994039536, PartGroup="Resistors,SMD,0402 1%"
R208: library part A02-0248, "Thick film resistor, SMD 0402, 1/16W, 1%", Manufacturer=Yageo, MPN=RC0402FR-0733KL, TemperatureRange="-55 - +125 deg C", Tolerance="1 %", AN=A02-0248, Height=0.349999994039536, PartGroup="Resistors,SMD,0402 1%"
R211: library part A02-0946, "Thick film resistror, SMD 0402, 1/16W, 1%", Manufacturer=Yageo, MPN=RC0402FR-07470RL, TemperatureRange="â€“55 to +155 deg C", Tolerance=1%, AN=A02-0946, Height=0.349999994039536, PartGroup="Resistors,SMD,0402 1%"
R216 R217: library part A02-1244, "Thick film resistor, SMD 0402, 1W, 1%", Manufacturer=Panasonic, MPN=ERJ-2RKF5101X, TemperatureRange="-55C to +125C", Tolerance=1%, AN=A02-1244, Height=0.349999994039536, PartGroup="Resistors,SMD,0402 1%"
SW100: library part A08-2830, "SWITCH, SMD, 260gf, 6.4mm X 6.2mm", Manufacturer="Dailywell Electronics Co.LTD", MPN=TS604VM1-035CR-R, TemperatureRange="-40 - +85 deg C", AN=A08-2830, Height=3.5, PartGroup="Mechanical devices,Switches,SMD"
TP200 TP201: library part A08-3187, "TH Test point - D3.6H2.7", AN=A08-3187, Height=0, PartGroup="Mechanical devices,Connectors,Test points"
TP202 TP203: library part A08-2176, "SMD Test point - 0.8mm", AN=A08-2176, Height=0, PartGroup="Mechanical devices,Connectors,Test points"
U100: library part A06-1553, "Atmel 8-bit RISC MCU, 48K Flash, 48pin TQFP, 7x7mm, 0.5m pitch package", Manufacturer=Microchip, MPN=ATmega4809-AFR, TemperatureRange="-40Â°C to +125Â°C", AN=A06-1553, PartGroup="Integrated Circuits,MCU, MPU, DSP,AVR MCU"
U200: library part A06-1578, "500mA Ultra Low Dropout LDO regulator, 2% accuracy, 1.6x1.6mm MLF", Manufacturer=Microchip, MPN=MIC5353YMT-TR, TemperatureRange="-40Â°C to +125Â°C", AN=A06-1578, Height=0.899999976158142, PartGroup="Integrated Circuits,Regulators,Linear"
U201: library part A06-1613, "Loadswitch, Rds(on) = 14.5mohm, 1.0mm x 1.5mm WLCSP, reverse blocking", Manufacturer=Microchip, MPN=MIC94163YCS-TR, TemperatureRange="-40Â°C to +125Â°C", AN=A06-1613, Height=0.800000011920929, PartGroup="Integrated Circuits,General linear,Analog switch, bus switch and MUX"
U202: library part A06-1826, "0.2A- 2.5A adjustable current limit power switch, 2mm x 2mm DFN", Manufacturer=Microchip, MPN=MIC2008YML-TR, TemperatureRange="-40C to +85C", AN=A06-1826, Height=0.850000023841858, PartGroup="Integrated Circuits,General linear,Analog switch, bus switch and MUX"
U203: library part A06-1475, "LDO 3.3V 0.5A 6TDFN", Manufacturer=Microchip, MPN=MIC5528-3.3YMT-T5, TemperatureRange="-40Â°C ~ 125Â°C", AN=A06-1475, Height=0.550000011920929, PartGroup="Integrated Circuits,Regulators,Linear"
U204 U205 U207 U208 U209: library part A06-1580, "Single-Bit Dual-Supply Transceive, 1.65-5.5 Translation and 3-State Outputs", Manufacturer="Diodes Incorporated", MPN=74LVC1T45FW4-7, TemperatureRange="-40C - 125C", AN=A06-1580, Height=0.400000005960464, PartGroup="Integrated Circuits,Interface ICs,Level translators"
U206: library part A06-1205, "32-bit RISC MCU 32pin", Manufacturer=Microchip, MPN=ATSAMD21E18A-MUT, TemperatureRange="-40Â°C to +85Â°C", AN=A06-1205, Height=1.20000004768372, PartGroup="Integrated Circuits,MCU, MPU, DSP,ARM MCU"
Y100: library part A07-0171, "Crystal, 32.768kHz, CL=9.0pF, ESR=70kOhm, SMD  LxW=3.2 x 1.5mm, 20ppm", Manufacturer=Microchip, MPN=VMK3-9001-32K7680000TR, TemperatureRange="-40 to 85C", Tolerance=20ppm, AN=A07-0171, Height=0.899999976158142, PartGroup="Frequency devices,Crystals,SMD"

## Free pads (board coordinates)
  oval 0.203x0.483 on Top Paste: 0(13.267,14.603) 0(13.267,15.797) 0(13.679,14.603) 0(13.679,15.797) 0(14.091,14.603) 0(14.091,15.797)
  round 0 hole 2.7 unplated paste-2539.97: 0(81.28,2.54) 0(81.28,17.78)

## Via types
v1: diameter 0.5, hole 0.2, Top Layer to Bottom Layer, 184 vias
v2: diameter 0.5, hole 0.2, Top Layer to Bottom Layer, tented both sides, 8 vias
v3: diameter 0.5, hole 0.2, Top Layer to Bottom Layer, tented top, 2 vias

## Nets (pads, with @x,y where several pads share a name; then routed paths per layer and width w, separated by ;. In a path a pad name is that pad's centre, name@x,y a point inside that pad or via, vN(x,y) a via of type N, cw(c..) or ccw(c..) an arc to the next point about the centre after c; other vN are vias at no path point)
BOOT: TP202.1 U206.25 | length 1.5
  Top Layer w0.2: v3(12.4,5.777) U206.25@13.933,5.777
CDC_RX: J100.3 J101.1 U208.4 | length 16.7
  Top Layer w0.15: U208.4@21.429,6.175 21.571,6.175 21.746,6 22.437,6 22.637,6.2 v1(22.655,6.2)
  Bottom Layer w0.15: J100.3@12.7,2.337 14.813,4.45 16.591,4.45 16.891,4.15 21.839,4.15 22.955,5.266 22.955,5.9 v1(22.655,6.2) 23.292,6.837 23.292,7.117 23.795,7.62 J101.1@24.4,7.62 ; J101.1@24.4,7.61 J101.1@24.45,7.61
CDC_RX_CTRL: U206.19 U208.5 | length 14.1
  Top Layer w0.15: v1(12.255,8.925) U206.19@13.28,8.924 ; U208.5@21.429,6.525 v1(22.03,6.525)
  Bottom Layer w0.15: v1(12.255,8.925) 12.266,8.936 13.556,8.936 17.659,4.833 18.629,4.833 19.019,5.223 19.019,5.585 19.409,5.975 21.543,5.975 22.03,6.462 v1(22.03,6.525)
CDC_TX: J100.4 J103.1 U209.4 | length 12.6
  Top Layer w0.15: U209.4@21.429,4.675 21.454,4.65 21.705,4.65 21.793,4.562 21.821,4.562 21.833,4.55 22.451,4.55 22.662,4.34 v1(22.7,4.34)
  Bottom Layer w0.15: J100.4@15.24,2.743 15.972,3.475 16.673,3.475 17.048,3.85 22.211,3.85 v1(22.7,4.34) 23.43,5.069 23.43,5.9 23.88,6.35 J103.1@24.4,6.35
CDC_TX_CTRL: U206.21 U209.5 | length 13
  Top Layer w0.15: v1(12.255,7.925) U206.21@13.28,7.924 ; U209.5@21.429,5.025 v1(22.03,5.025)
  Bottom Layer w0.15: v1(12.255,7.925) 12.286,7.894 14.043,7.894 17.447,4.491 21.496,4.491 v1(22.03,5.025)
DAC: R208.2 U206.3 | length 15.3
  Top Layer w0.15: U206.3@18.06,7.424 v1(18.804,7.424) ; R208.2@21.492,15.725 22.254,14.963 22.254,13.816 v1(21.755,13.317) v1@21.755,13.267
  Bottom Layer w0.15: v1(18.804,7.424) 18.83,7.424 19.856,8.45 19.967,8.45 21.541,10.024 22.204,10.024 22.755,10.575 ; 22.755,10.575 22.755,12.317 ; 22.755,10.575 22.755,12.317 ; 22.755,12.317 v1(21.755,13.317) 22.755,12.317
DBG0: J100.53 J104.1 U207.4 | length 25.5
  Top Layer w0.15: v1(12.303,16.548) 14.211,16.548 J100.53@15.24,17.577 ; U207.4@21.429,8.675 22.527,8.675 22.755,8.447 v1(22.755,7.7)
  Bottom Layer w0.15: v1(12.303,16.548) 12.303,12.036 17.69,6.649 19.125,6.649 19.579,7.103 19.579,7.213 20.066,7.7 v1(22.755,7.7) 23.945,8.89 J104.1@24.4,8.89 J104.1@24.475,8.815
DBG0_CTRL: U206.15 U207.5 | length 12.5
  Top Layer w0.15: U206.15@14.416,10.556 U206.15@14.416,10.861 ; U206.15@14.42,10.57 14.42,11.07 14.591,11.241 v1(14.591,11.325) ; U207.5@21.429,9.025 21.872,9.025 22.022,9.175 v1(22.104,9.175)
  Bottom Layer w0.15: v1(14.591,11.325) 14.591,11.306 18.329,7.568 18.329,7.227 18.607,6.949 19.001,6.949 19.279,7.227 19.279,7.338 21.306,9.365 21.841,9.365 22.031,9.175 v1(22.104,9.175)
DBG1: J100.5 J105.1 U205.4 | length 15.9
  Top Layer w0.15: J100.5@17.78,2.337 17.78,2.565 19.04,3.825 19.046,3.819 22.904,3.819 23.23,4.145 23.23,5.45 23.23,8.15 23.105,8.275 v1(23.105,8.79) 23.105,9.794 22.749,10.15 22.326,10.15 22.276,10.1 21.68,10.1 U205.4@21.605,10.175
  Bottom Layer w0.15: v1(23.105,8.79) 23.548,9.233 23.548,9.825 23.883,10.16 J105.1@24.4,10.16
DBG1_CTRL: U205.5 U206.16 | length 20.3
  Top Layer w0.15: U206.16@13.916,10.556 v1(13.916,11.375) ; U205.5@21.429,10.525 v1@22.054,10.525
  Bottom Layer w0.15: 14.421,11.88 v1(13.916,11.375) 14.421,11.88 ; 14.421,11.88 14.8,11.88 ; 14.421,11.88 14.8,11.88 ; 14.8,11.88 16.705,9.975 ; 14.8,11.88 16.705,9.975 ; 16.705,9.975 18.905,9.975 ; 16.705,9.975 18.905,9.975 ; 18.905,9.975 19.505,10.575 ; 18.905,9.975 19.505,10.575 ; 19.505,10.575 v1(22.079,10.575) 19.505,10.575
DBG2: J100.6 J106.1 U204.4 | length 14.3
  Top Layer w0.15: J100.6@20.32,2.743 20.32,2.766 21.029,3.475 23.087,3.475 23.58,3.968 23.58,5.376 v1(23.58,11.435) ; U204.4@21.429,11.675 21.855,11.675 21.88,11.7 22.255,11.7 22.52,11.435 v1@23.555,11.435
  Bottom Layer w0.15: v1@23.555,11.435 v1(23.58,11.435) J106.1@24.4,11.435
DBG2_CTRL: U204.5 U206.11 | length 12.7
  Top Layer w0.15: U206.11@16.416,10.556 16.416,11.537 16.654,11.775 v1(17.655,11.775) ; U204.5@21.429,12.025 21.88,12.025 22.03,12.175 v1(22.154,12.175) v1@22.254,12.175
  Bottom Layer w0.15: 19.571,11.775 v1(17.655,11.775) 19.571,11.775 ; 19.571,11.775 19.971,12.175 ; 19.571,11.775 19.971,12.175 ; 19.971,12.175 v1(22.154,12.175) ; 19.971,12.175 v1(22.154,12.175) ; v1(22.154,12.175) 22.254,12.175 v1(22.154,12.175)
DBG2_GPIO: U204.3 U206.12 | length 6.3
  Top Layer w0.15: U206.12@15.916,10.556 15.916,11.461 16.722,12.267 18.013,12.267 18.205,12.075 19.479,12.075 19.879,11.675 U204.3@20.729,11.675
DBG3: J100.54 J102.1 R209.2 | length 20.1
  Top Layer w0.15: v1(11.265,14.525) 11.49,14.3 11.69,14.3 12.214,13.776 R209.2@12.214,13.7
  Bottom Layer w0.15: v1(11.265,14.525) 11.265,16.548 J100.54@12.7,17.983 12.7,17.834 14.652,15.882 15.107,15.882 16.054,16.829 17.124,16.829 18.234,15.72 20.095,15.72 21.515,14.3 21.951,14.3 23.551,12.7 J102.1@24.4,12.7
DBG3_CTRL: Q200.1 R210.1 U206.17 | length 5.1
  Top Layer w0.15: R210.1@12.215,11.684 12.04,11.859 Q200.1@12.04,12.65 13.242,12.65 13.441,12.451 13.441,10.986 13.28,10.825 U206.17@13.28,9.924
GND: C100.2 C101.2 C102.1 C103.1 C104.1 C105.2 C200.1 C201.2 C202.1 C203.1 C204.1 C205.1 C206.2 C207.2 C209.1 J100.15 J100.24 J100.33 J100.42 J100.52 J202.2 J203.1 J203.2 J203.3 J203.4 J203.A1/B12 J203.B1/A12 Q200.2 R203.2 R204.2 R205.1 R206.1 R207.1 R210.2 R211.2 R213.2 R214.2 R216.2 R217.2 SW100.1 SW100.2 TP200.1 TP201.1 TP203.1 U100.15 U100.29 U100.43 U200.2 U200.7 U201.C1 U202.5 U202.7 U203.3 U203.7 U204.2 U205.2 U206.10 U206.28 U206.33 U207.2 U208.2 U209.2 | length 66.1
  Top Layer w0.15: Q200.2@12.04,13.1 12.575,13.1 12.75,13.275 v1(13.19,13.275) 13.215,13.25 R205.1@13.979,13.25
  Top Layer w0.166: v1(18.48,12.65) 18.73,12.4 19.71,12.4 20.085,12.025 U204.2@20.729,12.025 ; C202.1@19.058,11.5 20.033,10.525 U205.2@20.729,10.525 ; v1(19.734,8.925) 19.759,8.9 19.804,8.9 20.217,8.9 20.343,9.025 U207.2@20.729,9.025 ; v1@20.13,5.025 U209.2@20.729,5.025 ; v1@20.155,6.525 U208.2@20.729,6.525
  Top Layer w0.175: U203.3@13.279,15.725 13.279,15.2 U203.7@13.679,15.2 ; v1(15.505,14.225) 16.18,14.225 v1(16.905,14.225) ; R204.2@17.355,15.725 17.355,16.122 17.59,16.357 18.89,16.357 18.969,16.436 v1(19.057,16.436) 19.355,16.138 C201.2@19.355,15.725 ; R206.1@19.48,13.775 19.68,13.975 v1(20.199,13.975) ; R207.1@19.555,6.525 19.559,6.521 19.861,6.521 19.932,6.45 v1(20.08,6.45) v1@20.155,6.525 ; v1(20.023,4.998) 20.103,4.998 v1@20.13,5.025 ; v1@20.089,5.025 v1@20.13,5.025 ; v1@20.125,5.02 v1@20.13,5.025 ; C101.2@47.065,14.142 47.909,14.142 49.32,12.73 ; C100.2@55.99,12.838 C100.2@56.074,12.838
  Top Layer w0.2: U203.7@13.679,15.2 14.354,15.2 14.879,14.675 15.38,14.675 15.428,14.628 15.505,14.55 ; v1(13.97,2.921) 13.97,3.615 14.155,3.8 14.732,3.8 14.93,3.998 14.93,4.575 15.424,5.069 15.424,7.909 U206.33@15.679,8.164 ; v1(15.505,14.225) 15.505,14.55 ; 15.505,14.705 15.505,14.628 15.505,14.55 ; U206.33@15.689,8.174 16.916,9.401 16.916,11.112 17.063,11.259 18.817,11.259 C202.1@19.058,11.5 ; U201.C1@21.242,14.775 v1(21.755,14.775)
  Top Layer w0.25: J203.A1/B12@6.39,13.36 J203.A1/B12@6.665,13.36 ; J203.B1/A12@6.665,6.96 7.368,6.96 7.515,6.814 7.515,5.821 7.844,5.493 R217.2@7.844,4.575 ; U202.5@8.785,13.129 U202.7@8.785,14.028 7.784,14.028 7.627,14.186 7.627,14.452 7.535,14.544 7.535,14.84 7.246,15.128 7.246,15.393 7.081,15.558 7.062,15.558 6.913,15.707 6.913,16.168 7.172,16.426 v1(8.19,16.426) 8.192,16.424 8.986,16.424 9.518,15.892 9.536,15.892 9.685,15.743 C206.2@9.685,15.725 ; R216.2@9.752,5.633 10.684,5.633 10.892,5.425 v2(10.96,5.425) ; v1(10.325,11.5) 10.45,11.5 10.617,11.667 ; 10.599,11.649 10.617,11.667 ; R203.2@12.175,10.644 12.157,10.644 12.008,10.793 12.008,10.811 11.407,11.412 11.407,11.542 R210.2@11.265,11.684 11.248,11.667 10.617,11.667 ; C205.1@12.357,15.597 12.754,15.2 U203.7@13.279,15.2 ; 15.505,14.705 15.556,14.756 15.556,15.054 15.607,15.105 15.607,15.277 v1(15.655,15.325) ; v1(15.755,12.8) 15.782,12.827 C200.1@16.695,12.827 16.695,13.233 16.905,13.443 v1(16.905,14.225) 16.905,15.225 R204.2@17.405,15.725 ; 25.248,14.104 C103.1@26.162,14.104 26.794,14.104 26.794,13.459 v1(26.67,13.335) ; C104.1@39.8,11.968 39.82,11.968 39.825,11.964 C104.1@39.825,11.96 ; C105.2@39.825,10.32 v1(39.825,11.198) C104.1@39.825,11.92
  Top Layer w0.27: v1@46.507,13.584 C101.2@47.054,14.131 ; C102.1@47.264,5.852 47.264,6.241 U100.43@48.125,7.102 48.962,7.938 v1(49.111,7.938) ; 53.89,10.738 C100.2@55.99,12.838 ; C100.2@56.074,12.838 v1@56.546,13.309
  other v1: 5.08,2.921 6.35,2.921 8.89,2.921 11.43,2.921 16.51,2.921 19.05,2.921 21.59,2.921 24.13,2.921 26.67,2.921 29.21,2.921 31.75,2.921 34.29,2.921 36.83,2.921 39.37,2.921 41.91,2.921 44.45,2.921 46.99,2.921 49.53,2.921 52.07,2.921 54.61,2.921 57.15,2.921 59.69,2.921 62.23,2.921 64.77,2.921 67.31,2.921 69.85,2.921 72.39,2.921 74.93,2.921 77.724,2.921 78.74,2.921 82.391,4.331 1.429,4.826 82.391,5.308 7.544,5.792 26.7,5.8 26.67,6.985 57.688,8.128 26.67,8.255 1.429,8.89 82.391,9.216 26.67,9.525 1.429,10.16 82.391,10.193 26.67,10.795 82.391,11.17 16.913,11.284 1.429,11.43 26.67,12.065 23.655,12.175 56.583,13.273 5.39,13.413 46.507,13.575 10.366,14.025 7.579,14.5 82.391,15.078 1.429,15.494 6.1,15.755 82.391,16.055 5.08,17.399 6.35,17.399 8.89,17.399 11.43,17.399 13.97,17.399 16.51,17.399 19.05,17.399 21.59,17.399 24.13,17.399 26.67,17.399 29.21,17.399 31.75,17.399 34.29,17.399 36.83,17.399 39.37,17.399 41.91,17.399 44.45,17.399 46.99,17.399 49.53,17.399 52.07,17.399 54.61,17.399 57.15,17.399 59.69,17.399 62.23,17.399 64.77,17.399 67.31,17.399 69.85,17.399 72.39,17.399 74.93,17.399 77.724,17.399 78.74,17.399
  other v2: 5.235,6.924 10.093,8.006 3.701,8.493
ID_SYS: J100.2 R218.1 U206.22 | length 9.6
  Top Layer w0.15: R218.1@9.748,4.513 9.748,4.114 10.16,3.703 J100.2@10.16,2.743 ; v1(11.055,7.675) 11.306,7.424 U206.22@13.28,7.424
  Bottom Layer w0.15: J100.2@10.16,2.743 10.16,6.78 v1(11.055,7.675)
NetC101_1: C101.1 L100.2 U100.28 | length 3
  Top Layer w0.175: L100.2@46.452,14.92 46.847,15.315 47.236,15.315 C101.1@47.737,14.814
  Top Layer w0.27: C101.1@47.909,14.849 U100.28@48.832,13.925
NetC201_1: C201.1 U200.6 | length 1.3
  Top Layer w0.2: U200.6@17.655,14.725 17.655,14.975 C201.1@18.405,15.725
NetC206_1: C206.1 U202.2 | length 0.8
  Top Layer w0.15: U202.2@8.785,14.899 C206.1@8.785,15.725
NetC208_2: C208.2 Q201.1 R214.1 | length 5.5
  Top Layer w0.15: v2(8.338,12.122) 8.366,12.15 Q201.1@8.927,12.15 ; C208.2@9.818,10.931 10.431,10.931 10.536,10.825 v2(10.631,10.825) 10.631,10.339 R214.1@11.145,9.825
  Bottom Layer w0.15: v2(8.338,12.122) 9.635,10.825 v2(10.631,10.825)
NetD100_1: D100.1 R104.2 | length 1.3
  Top Layer w0.15: D100.1@74.168,10.96 74.38,10.748 75.173,10.748 R104.2@75.311,10.61
NetD200_1: D200.1 R215.1 | length 1.3
  Top Layer w0.15: D200.1@11.715,4.575 R215.1@12.98,4.575
NetJ100_36: J100.36 J108.1 | length 16.9
  Top Layer w0.175: v1(56.626,15.7) 56.685,15.7 58.42,17.435 J100.36@58.42,17.983
  Bottom Layer w0.175: J108.1@44.04,12.722 53.647,12.722 v1(56.626,15.7)
NetJ100_37: J100.37 J107.1 | length 17.8
  Bottom Layer w0.175: J107.1@44.04,11.197 45.154,12.31 54.435,12.31 57.15,15.025 57.15,16.307 J100.37@55.88,17.577
NetJ111_2: J111.2 Y100.2 | length 1.3
  Top Layer w0.15: J111.2@37.793,9.166 Y100.2@37.793,10.456
NetJ203_A5: J203.A5 R217.1 | length 14.7
  Top Layer w0.15: v2(5.468,12.035) 5.468,11.634 5.691,11.41 J203.A5@6.665,11.41 ; v2(6.165,4.575) R217.1@6.944,4.575
  Bottom Layer w0.15: v2(5.468,12.035) 2.827,12.035 2.15,11.358 2.15,8.219 5.737,4.632 6.108,4.632 v2(6.165,4.575)
NetJ203_B5: J203.B5 R216.1 | length 4.4
  Top Layer w0.15: J203.B5@6.665,8.41 7.411,8.41 7.865,7.956 7.865,6.208 8.44,5.633 R216.1@8.852,5.633
NetQ200_3: Q200.3 R209.1 | length 1
  Top Layer w0.15: R209.1@11.214,13.7 11.355,13.559 Q200.3@11.355,12.8
NetR103_2: R103.2 SW100.3 SW100.4 | length 7.4
  Top Layer w0.15: R103.2@76.454,10.61 78.391,10.61 ; SW100.4@78.391,7.41 78.391,10.61 ; SW100.3@78.391,12.91 78.391,10.61